# EAGLE board AVR_mini_doper (EAGLE 4.16)
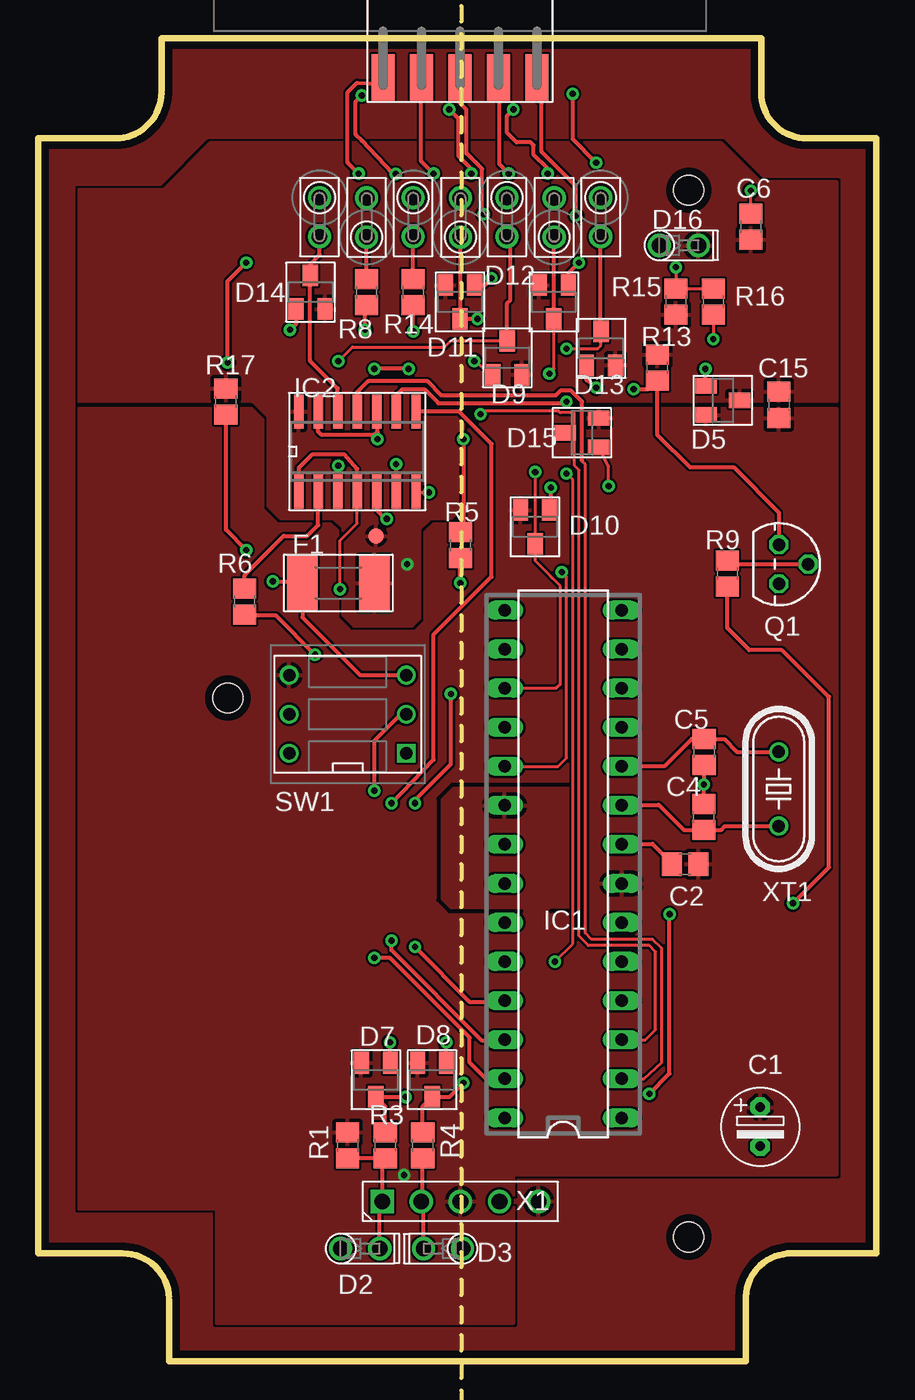
[diagram p0: board, top side]
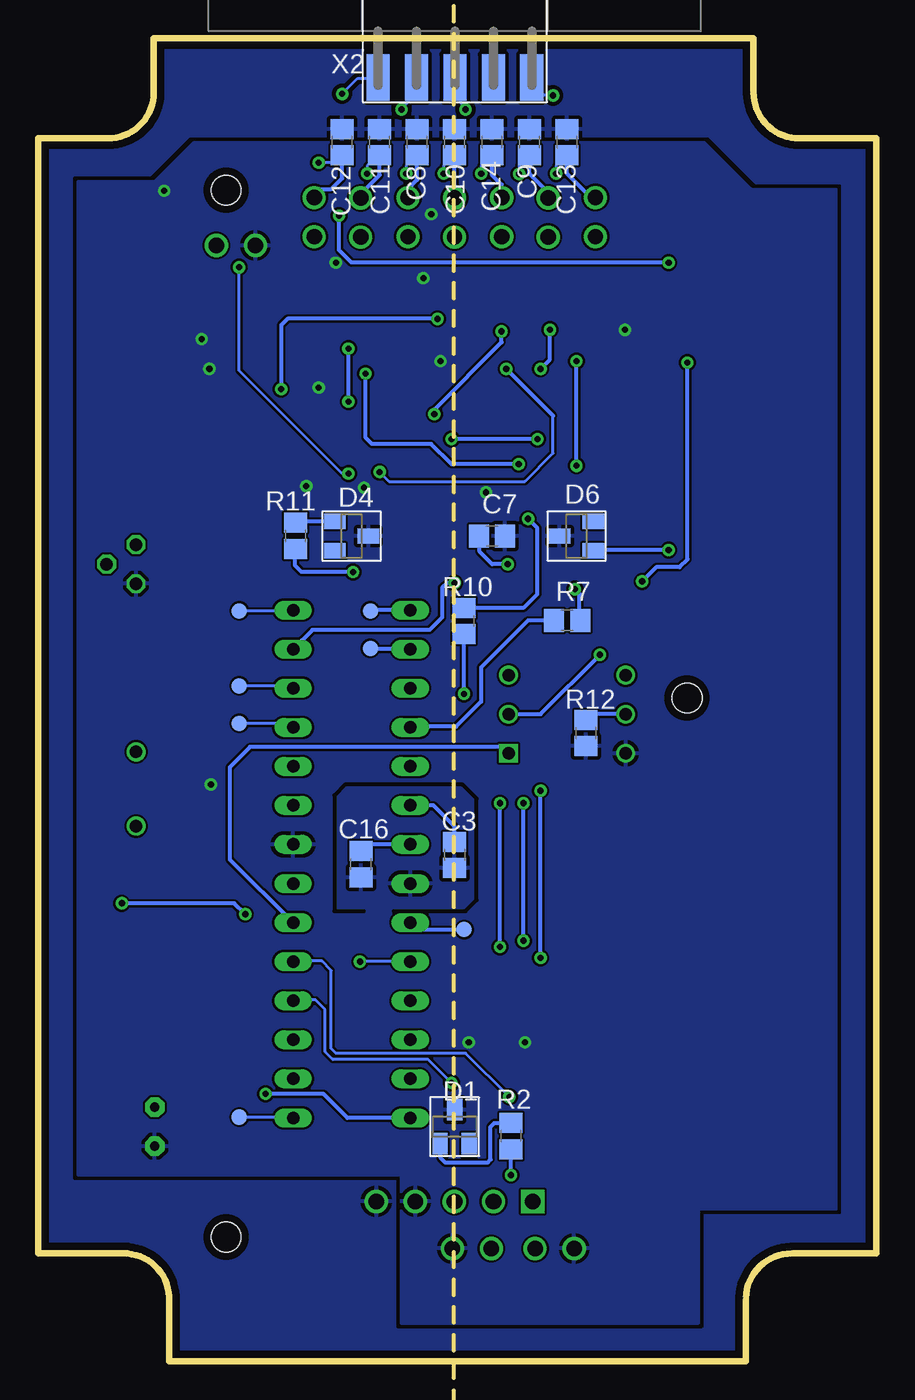
[diagram p1: board, bottom side, seen from below]

Size 54.5 x 86 mm. Coordinates in mm from the lower left corner, seen from the top.
Outline: 5.4,7 0,7 0,79.5 5,79.5 arc90 8,82.5
Outline: 8.5,4 8.5,0 46,0 46,3.9 arc-94 49,7
Outline: 49.1,7 54.5,7 54.5,79.5 50.1,79.5
Outline: 8,82.6 8,86 47,86 47,82.5 arc90 50,79.5
Outline: 8.5,4.1 arc88 5.5,7
Copper layers (1*16): Top 0.035mm / dielectric 1.5mm / Bottom 0.035mm
Design rules "pcpPool2Lagen": minimum track width 0.15mm, minimum drill 0.3mm, track to track 0.15mm, track to pad 0.15mm, pad to pad 0.15mm, via to via 0.15mm, smd to smd 2mil, copper to edge 0.5mm, drill to drill 0.25mm, minimum pad ring 0.2mm, minimum via ring 0.2mm, stop-mask expansion 0mil, vias tented up to drill 0.4mm, thermal gap 0.25mm
Holes 1.93 mm at 42.29,8.06 12.32,43.11 42.29,76.13
tKeepout: area 12.3,0 to 17.3,11.8; area 37.3,0 to 42.3,11.8; area 37.2,53.8 to 42.3,58.8
bKeepout: area 41.3,6 to 43.3,10; area 11.3,41.1 to 13.3,45.1; area 41.3,74.1 to 43.3,78.1
tRestrict: 8 lines
bRestrict: 8 lines
Milling: 55 lines

## Footprints (pad centres in the part's own frame; a part is rotated, then mirrored left to right if it is on the bottom)
ELC-2.5 = drill 0.61 pad 1.27 octagon: 1 -1.27,0; 2 1.27,0
C0805 = smd 1.3 x 1.5: 1 -0.85,0; 2 0.85,0
SOT23 = smd 1 x 1.4: 1 0.95,-1.1; 2 -0.95,-1.1; 3 0,1.1
DIODE1 = drill 1 round: 1 -1.27,0; 2 1.27,0
MINI_FUSE = smd 2 x 3.5: 1 -2.35,0; 2 2.35,0
DIL28 = drill 0.813 long: 1 -16.51,-3.81; 2 -13.97,-3.81; 3 -11.43,-3.81; 4 -8.89,-3.81; 5 -6.35,-3.81; 6 -3.81,-3.81; 7 -1.27,-3.81; 8 1.27,-3.81; 9 3.81,-3.81; 10 6.35,-3.81; 11 8.89,-3.81; 12 11.43,-3.81; 13 13.97,-3.81; 14 16.51,-3.81; 15 16.51,3.81; 16 13.97,3.81; 17 11.43,3.81; 18 8.89,3.81; 19 6.35,3.81; 20 3.81,3.81; 21 1.27,3.81; 22 -1.27,3.81; 23 -3.81,3.81; 24 -6.35,3.81; 25 -8.89,3.81; 26 -11.43,3.81; 27 -13.97,3.81; 28 -16.51,3.81
SO14 = smd 0.6 x 2.2: 1 -3.81,-2.6; 2 -2.54,-2.6; 3 -1.27,-2.6; 4 0,-2.6; 5 1.27,-2.6; 6 2.54,-2.6; 7 3.81,-2.6; 8 3.81,2.6; 9 2.54,2.6; 10 1.27,2.6; 11 0,2.6; 12 -1.27,2.6; 13 -2.54,2.6; 14 -3.81,2.6
LBEAD = drill 1 round: 1 1.27,0; 2 -1.27,0
TO-92-CBE = drill 0.813 octagon: B 0,1.905; C -1.27,0; E 1.27,0
R0805 = smd 1.3 x 1.5: 1 -0.85,0; 2 0.85,0
DIL03 = drill 0.813 square: 1 -2.54,-3.81 | drill 0.813 round: 2 0,-3.81; 3 2.54,-3.81; 4 2.54,3.81; 5 0,3.81; 6 -2.54,3.81
TEP10 = smd 1 x 1: 1 0,0
PINS05 = drill 1.016 square: 1 -5.08,0 | drill 1.016 round: 2 -2.54,0; 3 0,0; 4 2.54,0; 5 5.08,0
HEADER_2X5_2_54 = smd 1.5 x 3: 1 -5,-2.5; 3 -2.5,-2.5; 5 0,-2.5; 7 2.5,-2.5; 9 5,-2.5 | smd 1.5 x 3 bottom: 2 -5,-2.5; 4 -2.5,-2.5; 6 0,-2.5; 8 2.5,-2.5; 10 5,-2.5
HC49/S = drill 0.813 round: 1 -2.413,0; 2 2.413,0

## Placement (x,y rotation side)
C1  4U7  [ELC-2.5]  46.94,15.24 270 top
C2  100N  [C0805]  42.06,32.31 180 top
C3  100N  [C0805]  27.43,32.92 270 bottom
C4  22P  [C0805]  43.27,35.37 90 top
C5  22P  [C0805]  43.29,39.61 270 top
C6  100N  [C0805]  46.33,73.76 90 top
C7  100N  [C0805]  24.99,53.64 0 bottom
C8  10P  [C0805]  29.88,79.26 90 bottom
C9  10P  [C0805]  22.57,79.26 90 bottom
C10  10P  [C0805]  27.44,79.26 90 bottom
C11  10P  [C0805]  32.32,79.26 90 bottom
C12  10P  [C0805]  34.76,79.26 90 bottom
C13  10P  [C0805]  20.13,79.26 90 bottom
C14  10P  [C0805]  25.01,79.26 90 bottom
C15  100n  [C0805]  48.16,62.18 90 top
C16  100N  [C0805]  33.53,32.31 270 bottom
D1  RED  [SOT23]  27.43,15.24 0 bottom
D2  Z3V6  [DIODE1]  20.93,7.32 180 top
D3  Z3V6  [DIODE1]  26.31,7.32 0 top
D4  RED  [SOT23]  34.14,53.64 270 bottom
D5  BAV99  [SOT23]  44.51,62.47 270 top
D6  RED  [SOT23]  19.51,53.64 90 bottom
D7  BAV99  [SOT23]  21.95,18.29 180 top
D8  BAV99  [SOT23]  25.6,18.29 180 top
D9  BAV99  [SOT23]  30.49,65.24 0 top
D10  BAV99  [SOT23]  32.3,54.24 180 top
D11  BAV99  [SOT23]  27.42,68.87 180 top
D12  BAV99  [SOT23]  33.52,68.87 180 top
D13  BAV99  [SOT23]  36.59,65.85 0 top
D14  BAV99  [SOT23]  17.69,69.51 0 top
D15  BAV99  [SOT23]  35.34,60.36 90 top
D16  Z5V1  [DIODE1]  41.66,72.54 180 top
F1  125mA  [MINI_FUSE]  19.51,50.6 0 top
IC1  ATMEGA8/DIL28  [DIL28]  34.12,32.32 90 top
IC2  74HC126  [SO14]  20.74,59.14 0 top
L1  BEAD  [LBEAD]  30.47,74.38 90 top
L2  BEAD  [LBEAD]  21.35,74.36 270 top
L3  BEAD  [LBEAD]  27.44,74.36 270 top
L4  BEAD  [LBEAD]  33.54,74.36 270 top
L5  BEAD  [LBEAD]  36.56,74.38 90 top
L6  BEAD  [LBEAD]  18.28,74.38 90 top
L7  BEAD  [LBEAD]  24.37,74.38 90 top
Q1  BC547  [TO-92-CBE]  48.16,51.82 270 top
R1  2K2  [R0805]  20.12,14.02 270 top
R2  150R  [R0805]  23.77,14.63 90 bottom
R3  68R  [R0805]  22.56,14.02 90 top
R4  68R  [R0805]  24.99,14.02 90 top
R5  10k  [R0805]  27.44,53.05 90 top
R6  10K  [R0805]  13.41,49.38 90 top
R7  10K  [R0805]  20.12,48.16 0 bottom
R8  1K  [R0805]  21.34,69.49 90 top
R9  10K  [R0805]  44.81,51.21 90 top
R10  10K  [R0805]  26.82,48.11 90 bottom
R11  150R  [R0805]  37.78,53.66 90 bottom
R12  1K  [R0805]  18.9,40.84 270 bottom
R13  1K  [R0805]  40.25,64.6 270 top
R14  1K  [R0805]  24.37,69.51 90 top
R15  33K  [R0805]  41.45,68.88 90 top
R16  22K  [R0805]  43.89,68.88 270 top
R17  150R  [R0805]  12.19,62.38 270 top
SW1  DIL3  [DIL03]  20.12,42.06 90 top
T1  P1  [TEP10]  41.44,43.9 0 bottom
T2  P1  [TEP10]  41.44,41.47 0 bottom
T5  P1  [TEP10]  41.44,48.78 0 bottom
T6  P1  [TEP10]  32.91,46.34 0 bottom
T7  P1  [TEP10]  32.91,48.78 0 bottom
T8  P1  [TEP10]  26.81,28.05 0 bottom
T9  P1  [TEP10]  41.44,15.86 0 bottom
T10  P1  [TEP10]  21.96,53.66 0 top
X1  SIL5  [PINS05]  27.44,10.38 0 top
X2  HEADER 10  [HEADER_2X5_2_54]  27.42,85.97 0 bottom
XT1  12MHZ  [HC49/S]  48.15,37.2 90 top

## Library data of the parts
C1-C16 D1-D16 F1 IC1 IC2 L1-L7 Q1 R1-R17 SW1 T1 T2 T5-T10 X1 X2 XT1 = AVR_mini_doper

## Nets
CLK_DUP: L2.1 R8.2
CLK_S: C9.1 L2.2 X2.9
DRIVER_EN: IC1.18 R7.1
DRIVER_EN_3V3: IC2.1 IC2.4 R7.2
GND: C1.2 C2.2 C3.2 C4.2 C5.2 C6.2 C7.2 C16.2 D1.3 D2.2 D3.2 D4.3 D5.2 D6.3 D7.2 D8.2 D9.2 D10.2 D11.2 D12.2 D13.2 D14.2 D15.2 D16.2 IC1.8 IC1.22 IC2.7 Q1.E R12.2 R16.2 SW1.6 X1.4 X2.6
ISP_CLK: D10.3 IC1.17 R8.1
ISP_RESET: IC1.28 R9.1
ISP_RESET_3V3: Q1.B R9.2
ISP_SUP_PRESENT: IC1.24 R15.2 R16.1
ISP_TMISO: IC1.26 IC2.8
ISP_TMOSI: IC1.27 R6.1 SW1.2
ISP_TMOSI_3V3: IC2.2 R6.2
ISP_TSCK: IC1.25 R10.1
ISP_TSCK_3V3: IC2.5 R10.2
LED_BUSY: IC1.19 R11.1
LED_PLUS: D4.2 R11.2
PWR_LED_H: D1.2 R2.2
REC_EN: IC1.13 R5.1
REC_ENABLE: IC2.10 IC2.13 R5.2
RESET_DUP: D11.3 L3.1 Q1.C R13.2
RESET_S: C10.1 L3.2 X2.5
RXD: IC1.2 IC2.11
RXD_DUP: L7.2 R14.2
RXD_S: C14.1 L7.1 X2.8
SHIELD: C8.2 C9.2 C10.2 C11.2 C12.2 C13.2 C14.2 X1.5
SLOW_SCK: IC1.6 SW1.1
T_1: IC1.12 T1.1
T_2: IC1.11 T2.1
T_4: C16.1 IC1.21
T_5: IC1.14 T5.1
T_6: IC1.16 T6.1
T_7: IC1.15 T7.1
T_8: IC1.23 T8.1
T_9: IC1.1 T9.1
TMISO_DUP: D13.3 IC2.9 L5.2
TMISO_S: C12.1 L5.1 X2.1
TMOSI_DUP: D9.3 IC2.3 L1.2
TMOSI_S: C8.1 L1.1 X2.4
TMOSI_SW: R12.1 SW1.5
TSCK_DUP: D12.3 IC2.6 L4.1
TSCK_S: C11.1 L4.2 X2.3
TXD: D15.3 IC1.3 R14.1
TXD_DUP: D14.3 IC2.12 L6.2
TXD_S: C13.1 L6.1 X2.10
USB_M: D7.3 IC1.5 R3.2
USB_M_RAW: D2.1 R1.2 R3.1 X1.1
USB_P: D8.3 IC1.4 R4.2
USB_P_RAW: D3.1 R4.1 X1.2
VCC: C1.1 C2.1 C3.1 C15.1 D5.1 D7.1 D8.1 D10.1 D15.1 IC1.7 IC1.20 R1.1 R2.1 SW1.4 X1.3
VCC_DUP: C6.1 C7.1 C15.2 D5.3 D9.1 D11.1 D12.1 D13.1 D14.1 D16.1 F1.2 IC2.14 R13.1 R15.1 R17.1 T10.1
VCC_DUT_LED: D6.2 R17.2
VTG: F1.1 SW1.3 X2.2
XTAL1: C4.1 IC1.9 XT1.1
XTAL2: C5.1 IC1.10 XT1.2

## Tracks (layer width: path | path; a pad name or v marks a point on that pad's centre or on a via)
CLK_DUP
  Top 0.254: R8.2 21.34,70.31 21.35,70.32 L2.1
CLK_S  (via drill 0.4)
  Top 0.2: v23.24,77.19 23.22,77.22 23.06,77.22
  Top 0.254: 23.06,77.22 21.03,79.35 20.62,79.76 20.62,81.89 v21.03,82.3
  Bottom 0.2: 22.55,78.44 22.57,78.42 C9.1 22.55,78.44 | 22.55,78.44 23.24,77.75 v23.24,77.19 | v21.03,82.3 22.45,82.3 22.45,83.21 22.42,83.25 X2.9
  Bottom 0.254: L2.2 21.35,76.01 22.55,77.22 22.55,78.44
DRIVER_EN
  Bottom 0.2: 30.38,41.25 30.34,41.21 IC1.18 | R7.1 20.93,48.16
  Bottom 0.254: 30.38,41.25 27.33,41.25 25.7,42.88 25.7,45.11 22.66,48.16 21.95,48.16 R7.1
DRIVER_EN_3V3  (via drill 0.4)
  Top 0.2: v19.61,50.19 19.61,53.34 20.73,54.46 20.73,56.59 20.74,56.58 IC2.4
  Top 0.254: IC2.1 16.93,58.08 17.78,58.93 19.91,58.93 20.73,58.01 20.73,56.59 20.73,56.49 20.74,56.5 IC2.4
  Bottom 0.2: R7.2 19.3,48.16
  Bottom 0.254: v19.61,50.19 19.3,49.89 19.3,48.16
GND  (via drill 0.4)
  Top 0.2: C6.2 v46.33,76.1 | R16.2 v43.89,66.45 | 43.29,37.5 v43.28,37.49 43.27,37.48 | 41.21,32.35 C2.2 | IC1.8 37.9,33.63 | D9.2 v28.35,65.02 | D15.2 37.08,58.16 v37.08,56.9
  Top 0.254: 43.29,37.5 C5.2 | C4.2 43.27,37.48 | 41.21,32.35 39.93,33.63 37.9,33.63 | D8.2 26.52,19.42 v26.52,20.73 | D7.2 22.86,19.42 v22.86,20.73 | IC2.7 24.59,56.48 v25.4,56.49 | X2.6 27.38,81.84 27.84,81.38 27.84,78.54 28.85,77.52 28.85,74.68 v28.96,74.57 | D14.2 16.74,67.44 v16.36,67.06 | D12.2 34.47,70.74 v35.15,71.42 | D13.2 35.64,63.78 v36.27,63.3 | D11.2 29.03,69.97 v29.46,70.41 | D5.2 43.38,63.15 v43.38,64.52 | D10.2 33.33,55.42 v33.33,56.79
  pour Bottom: 11.18,79.25 8.13,76.2 2.64,76.2 2.64,9.86 11.58,9.86 11.58,2.44 30.89,2.44 30.89,12.09 51.92,12.09 51.92,76.71 46.94,76.71 44.4,79.25
ISP_CLK  (via drill 0.4)
  Top 0.2: IC1.17 33.67,43.75 33.93,43.99 33.93,50.39 33.43,50.9 | 33.43,50.9 33.33,51 | 33.43,50.9 32.31,52.02 D10.3 | 21.23,68.64 R8.1 | D10.3 | D10.3 v32.31,57.81
  Top 0.254: v21.23,67.06 21.23,68.64 | v24.08,64.52 v21.84,64.52
  Bottom 0.2: 21.03,61.47 21.03,59.03 22.86,57.2 31.7,57.2 v32.31,57.81
  Bottom 0.254: v21.84,64.52 21.23,65.13 v21.23,67.06 | 21.03,61.47 v24.08,64.52
ISP_RESET  (via drill 0.4)
  Top 0.254: v39.73,17.37 41.05,18.69 v41.05,29.06 | v49.07,29.77 51.41,32.11 51.41,43.18 48.36,46.23 46.23,46.23 45.62,46.84 44.81,47.65 R9.1 44.81,50.39
  Bottom 0.254: IC1.28 34.4,15.81 35.97,17.37 v39.73,17.37 | v41.05,29.06 41.76,29.77 v49.07,29.77
ISP_RESET_3V3
  Top 0.254: R9.2 44.81,52.02 45.01,51.82 Q1.B
ISP_SUP_PRESENT  (via drill 0.4)
  Top 0.2: v33.59,25.97 34.75,27.13 34.75,57.3 v34.34,57.71 | R16.1 41.52,69.73 41.45,69.8 | 41.45,69.8 R15.2 | v41.45,71.12 41.45,69.8
  Bottom 0.2: IC1.24 v33.59,25.97 | v41.45,71.12 41.45,64.41 34.75,57.71 v34.34,57.71
ISP_TMISO  (via drill 0.4)
  Top 0.254: v22.96,36.27 25.7,39.12 25.7,47.24 29.46,51 29.46,59.64 27.36,61.74 IC2.8 | IC1.26 30.38,20.83 28.85,20.83 22.96,26.72 v22.96,27.33
  Bottom 0.254: v22.96,27.33 v22.96,36.27
ISP_TMOSI  (via drill 0.4)
  Top 0.254: v21.84,37.08 21.84,40.34 23.57,42.06 SW1.2 | IC1.27 29.06,18.39 28.04,19.41 28.04,21.03 22.86,26.21 v21.84,26.21 | v17.98,45.92 15.44,48.46 13.51,48.46 13.41,48.56 R6.1
  Bottom 0.254: v21.84,26.21 v21.84,37.08 | v17.98,45.92 21.84,42.06 SW1.2 23.98,42.06
ISP_TMOSI_3V3
  Top 0.254: R6.2 13.41,51.1 15.95,53.65 17.48,53.65 18.19,54.36 18.19,56.59 18.2,56.58 IC2.2
ISP_TSCK  (via drill 0.4)
  Top 0.254: v24.49,36.27 24.49,36.47 26.82,38.81 v26.82,43.38 26.82,43.48 | IC1.25 30.28,23.39 30.28,23.37 28.04,23.37 v24.49,26.92
  Bottom 0.254: v24.49,26.92 v24.49,36.27 | v26.82,43.38 R10.1
ISP_TSCK_3V3  (via drill 0.4)
  Top 0.254: IC2.5 22.05,56.51 22.05,55.27 22.55,54.76 v22.66,54.76
  Bottom 0.254: R10.2 25.59,48.97 22.96,48.97 22.05,49.89 22.05,54.15 v22.66,54.76
LED_BUSY  (via drill 0.4)
  Top 0.2: IC1.19 33.8,38.67 34.34,39.22 34.34,51 v34.04,51.31
  Bottom 0.2: 37.8,52.83 R11.1
  Bottom 0.254: v34.04,51.31 37.39,51.31 37.8,51.71 37.8,52.83
LED_PLUS
  Bottom 0.254: R11.2 37.78,54.55 37.8,54.56 37.76,54.59 D4.2
PWR_LED_H
  Bottom 0.254: R2.2 24.86,15.48 25.09,15.24 25.09,13.11 25.3,12.9 28.04,12.9 28.35,13.21 28.35,14.12 28.36,14.14 D1.2
REC_EN  (via drill 0.4)
  Top 0.254: R5.1 27.43,52.22 | R5.1 | v27.43,50.6 R5.1
  Bottom 0.254: IC1.13 36.68,47.55 29.06,47.55 28.25,48.36 28.25,50.29 27.94,50.6 v27.43,50.6
REC_ENABLE  (via drill 0.4)
  Top 0.254: IC2.13 18.2,60.44 18.39,60.25 21.84,60.25 22.05,60.45 | IC2.10 22.05,61.77 22.05,60.45 | 22.05,60.45 v22.05,59.94 | R5.2 27.64,54.62 v27.64,59.94
  Bottom 0.254: v22.05,59.94 v27.64,59.94
RESET_DUP  (via drill 0.4)
  Top 0.254: D11.3 27.43,67.77 27.45,67.78 | 27.45,67.78 L3.1 | Q1.C 48.16,55.17 45.21,58.12 42.37,58.12 40.23,60.25 40.23,63.8 | 27.45,67.78 27.46,67.77 v28.55,67.77 | 40.23,63.8 40.25,63.79 R13.2 | v38.71,63.2 39.62,63.2 40.23,63.8
  Bottom 0.254: v28.55,67.77 38.3,67.77 38.71,67.36 v38.71,63.2
RESET_S  (via drill 0.4)
  Top 0.254: v26.72,81.38 27.33,80.77 27.33,78.33 28.14,77.52 v28.14,77.22
  Bottom 0.2: v26.72,81.38 27.43,82.6 27.43,83.31 27.42,83.33 X2.5 | 27.45,78.42 27.43,78.44 | C10.1 27.45,78.42 | v28.14,77.22 28.14,77.72 27.45,78.42
  Bottom 0.254: L3.2 C10.1
RXD
  Top 0.2: IC1.2 39.38,18.35 40.54,19.41 40.54,26.82 39.93,27.43 35.97,27.43 35.56,27.84 35.56,58.32 35.36,58.52
  Top 0.254: IC2.11 20.83,61.83 20.73,61.93 20.73,62.99 21.44,63.7 25.3,63.7 26.21,62.79 33.63,62.79 33.93,63.09 34.65,63.09 35.36,62.38 35.36,58.52
RXD_DUP
  Top 0.254: R14.2 24.37,70.32 | 24.37,70.32 L7.2 | 24.37,70.32 24.38,70.31
RXD_S  (via drill 0.4)
  Top 0.2: 24.89,83.21 24.92,83.24 X2.8
  Top 0.254: 24.89,83.21 24.89,78.03 v25.7,77.22
  Bottom 0.2: 24.99,78.44 25.01,78.42 C14.1 25.7,77.71 v25.7,77.22
  Bottom 0.254: L7.1 24.37,76.49 24.99,77.11 24.99,78.44
SHIELD
  pour Bottom (isolate 0.254, rank 2): 8.53,0.3 8.43,4.98 6.71,6.91 0.1,7.11 0.1,79.45 6.1,79.45 7.82,81.18 8.23,85.85 46.84,85.85 47.24,81.08 48.56,79.76 54.36,79.35 54.36,7.21 47.55,6.81 46.13,5.28 45.92,0.3
  pour Top (rank 3): 0,0 54.56,0 54.56,85.85 0,85.85
SLOW_SCK
  Bottom 0.254: IC1.6 42.06,32.61 42.06,38.61 40.74,39.93 24.28,39.93 23.88,39.52 SW1.1
T_1
  Bottom 0.2: IC1.12 37.96,43.75 38.11,43.9 T1.1
T_2
  Bottom 0.2: IC1.11 37.96,41.21 38.21,41.47 T2.1
T_4
  Bottom 0.254: C16.1 33.53,33.12 33.06,33.59 IC1.21
T_5
  Bottom 0.2: 37.9,48.87 IC1.14 37.99,48.78 T5.1
T_6
  Bottom 0.2: T6.1 32.88,46.29
  Bottom 0.254: IC1.16 32.88,46.29
T_7
  Bottom 0.2: 32.91,48.86 32.92,48.87 | 32.91,48.86 T7.1 | 32.88,48.83 32.91,48.86
  Bottom 0.254: IC1.15 32.88,48.83
T_8
  Bottom 0.254: T8.1 26.82,28.04 29.84,28.04 IC1.23
T_9
  Bottom 0.2: T9.1 41.45,15.85 37.97,15.85 IC1.1
TMISO_DUP  (via drill 0.4)
  Top 0.2: v34.34,65.84 36.37,65.84 36.58,66.04 36.58,66.95
  Top 0.254: IC2.9 23.27,61.73 23.27,62.79 23.67,63.2 25.09,63.2 26.01,62.28 34.24,62.28 v34.34,62.38 | D13.3 36.58,66.95 36.56,66.97 L5.2
  Bottom 0.254: v34.34,62.38 v34.34,65.84
TMISO_S  (via drill 0.4)
  Top 0.254: v34.75,82.4 34.75,79.45 v36.27,77.93
  Bottom 0.2: v34.75,82.4 33.73,83.41 32.41,83.41 32.42,83.42 X2.1 | C12.1 34.76,78.42 34.75,78.44 35.05,77.93 v36.27,77.93
  Bottom 0.254: L5.1 36.56,75.91 36.27,76.2 35.46,76.2 34.75,76.91 34.75,78.44
TMOSI_DUP  (via drill 0.4)
  Top 0.2: D9.3 26.82,66.34 26.42,65.94 20.42,65.94 v19.51,65.02
  Top 0.254: IC2.3 19.51,56.58 v19.51,58.22 | D9.3 30.47,66.36 30.48,68.78 30.68,68.99 30.68,72.95 30.52,73.11 L1.2
  Bottom 0.254: v19.51,58.22 v19.51,65.02
TMOSI_S  (via drill 0.4)
  Top 0.2: 29.97,83.41 X2.4
  Top 0.254: v30.58,77.22 29.97,77.83 29.97,83.41
  Bottom 0.2: C8.1 29.88,78.42 29.87,78.44 30.58,77.72 v30.58,77.22
  Bottom 0.254: L1.1 30.47,76.21 29.87,76.81 29.87,78.44
TMOSI_SW
  Bottom 0.254: SW1.5 18.49,42.06 18.9,41.66 R12.1
TSCK_DUP  (via drill 0.4)
  Top 0.2: v33.22,64.21 33.53,64.52 D12.3
  Top 0.254: IC2.6 23.28,57.7 v23.27,58.32 | D12.3 33.54,67.78 L4.1
  Bottom 0.254: v23.27,58.32 27.64,58.32 28.96,59.64 32.82,59.64 33.22,60.05 v33.22,64.21
TSCK_S  (via drill 0.4)
  Top 0.254: v33.12,77.22 33.12,77.52 32.21,78.44 32.21,79.05 32,79.25 31.09,79.25 30.48,79.86 30.48,80.97 v30.89,81.38
  Bottom 0.2: 32.31,78.44 32.32,78.42 C11.1 32.44,78.41 33.12,77.72 v33.12,77.22 | v30.89,81.38 29.87,82.7 29.87,83.52 X2.3
  Bottom 0.254: L4.2 33.54,75.88 32.31,77.11 32.31,78.44
TXD  (via drill 0.4)
  Top 0.2: IC1.3 39.48,20.89 40.13,21.54 40.13,26.62 39.73,27.03 35.76,27.03 35.15,27.64 35.15,57.93 34.85,58.23 34.85,59.95 D15.3 34.24,60.25 | v24.38,66.95 24.37,66.97 | v28.75,61.57 28.96,61.77 33.83,61.77 33.93,61.67 34.85,61.67 34.85,60.86 34.24,60.25 | 34.24,60.25
  Top 0.254: 24.37,66.97 R14.1
  Bottom 0.254: v24.38,66.95 24.38,66.24 28.75,61.87 v28.75,61.57
TXD_DUP
  Top 0.254: IC2.12 19.47,63.23 17.68,65.02 17.68,70.51 17.69,70.52 D14.3 17.69,71.34 18.29,71.93 18.29,73.15 18.27,73.14 L6.2
TXD_S  (via drill 0.4)
  Top 0.2: 22.2,83.06 X2.10
  Top 0.254: v20.83,77.22 20.12,77.93 20.12,82.5 20.73,83.11 22.2,83.06
  Bottom 0.2: 20.04,78.41 20.02,78.44 | 20.04,78.41 20.09,78.41 | 20.12,78.33 20.04,78.41 | 20.09,78.41 C13.1 | 20.09,78.41 20.83,77.72 v20.83,77.22
  Bottom 0.254: L6.1 18.55,75.65 20.12,77.22 20.12,78.33
USB_M  (via drill 0.4)
  Top 0.254: R3.2 22.55,16.56 21.95,17.17 | 21.95,17.17 D7.3 | 21.95,17.17 v23.88,17.17
  Bottom 0.2: v23.88,17.17 26.72,20.02 35.15,20.02 35.46,20.32 35.46,25.4 36.07,26.01 38,26.01 37.96,25.97 IC1.5
USB_M_RAW
  Top 0.254: 22.36,10.45 22.35,10.46 22.2,10.31 D2.1 | 22.36,10.45 X1.1 | R1.2 22.52,13.17 22.55,13.21 | 22.55,13.21 R3.1 | 22.36,10.45 22.36,13.02 22.55,13.21
USB_P  (via drill 0.4)
  Top 0.254: R4.2 24.99,16.56 25.6,17.17 | 25.6,17.17 D8.3 | v27.64,18.09 26.72,17.17 25.6,17.17
  Bottom 0.2: v27.64,18.09 29.16,19.61 35.36,19.61 35.87,20.12 35.87,22.86 36.47,23.47 37.9,23.47 IC1.4
USB_P_RAW
  Top 0.254: 24.91,10.45 24.89,10.46 | 24.91,10.45 X1.2 | D3.1 25.04,10.31 24.91,10.45 | X1.2 24.89,10.36 | R4.1 24.99,10.46 X1.2
VCC  (via drill 0.4)
  Bottom 0.254: v23.77,12.09 R2.1 | IC1.20 28.82,36.13 27.43,34.75 C3.1
  pour Top (rank 2): 2.64,61.98 51.92,61.98 51.92,12.09 30.89,12.09 30.89,2.44 11.58,2.44 11.58,9.86 2.64,9.86
VCC_DUP  (via drill 0.4)
  Bottom 0.254: C7.1 25.81,53.61 25.81,52.63 24.99,51.82 v23.98,51.82
  pour Top: 51.92,76.71 51.92,62.38 28.96,62.38 27.64,61.06 27.64,55.58 26.82,54.76 25.5,54.76 24.79,54.05 24.79,48.26 24.28,47.75 20.52,47.75 19.81,48.46 19.81,54.15 19.2,54.76 15.75,54.76 14.94,55.58 14.94,61.37 13.92,62.38 2.64,62.38 2.64,76.2 8.13,76.2 11.18,79.25 44.4,79.25 46.94,76.71
VCC_DUT_LED  (via drill 0.4)
  Top 0.254: R17.2 12.19,54.05 v13.51,52.73
  Bottom 0.254: D6.2 18.41,52.71 18.39,52.73 v13.51,52.73
VTG  (via drill 0.4)
  Top 0.254: SW1.3 20.93,44.6 17.17,48.36 17.17,50.7 | 17.17,50.7 17.16,50.69 F1.1 | v15.24,50.7 17.17,50.7 | X2.2 32.46,82.04 32.72,81.79 32.72,78.64 34.95,76.4 34.95,76.2 v34.95,74.47 | v12.29,64.92 12.29,70.21 v13.51,71.42
  Bottom 0.254: v15.24,50.7 14.33,51.61 12.8,51.61 12.29,52.12 v12.29,64.92 | v34.95,74.47 34.95,72.24 34.14,71.42 v13.51,71.42
XTAL1
  Top 0.2: 43.28,34.54 C4.1 | IC1.9 37.9,36.17
  Top 0.254: XT1.1 44.64,34.78 44.4,34.54 43.28,34.54 | C4.1 41.98,34.52 40.34,36.17 37.9,36.17
XTAL2
  Top 0.2: 43.28,40.44 C5.1 | 38,38.71 37.96,38.67 IC1.10
  Top 0.254: XT1.2 45.43,39.61 44.6,40.44 43.28,40.44 | C5.1 42.49,40.46 40.74,38.71 38,38.71